# EAGLE board SPv2.2-twin (EAGLE 7.1.0)
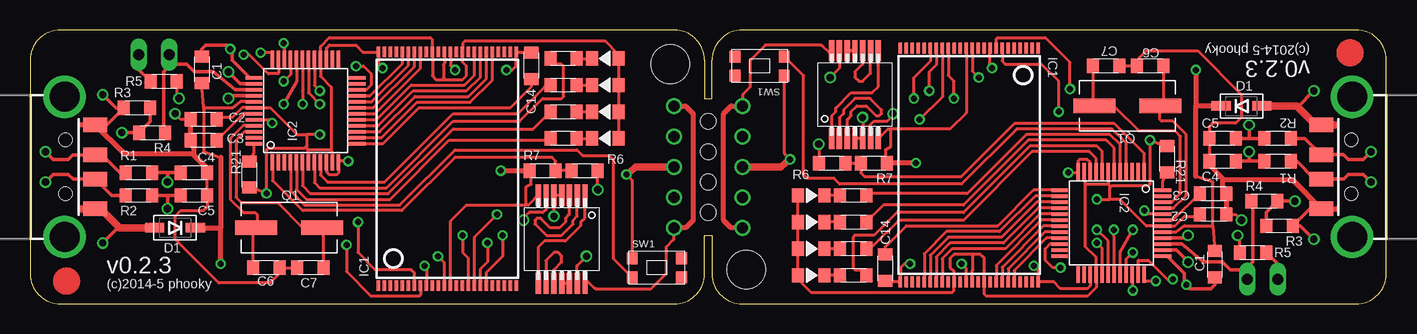
[diagram p0: board, top side]
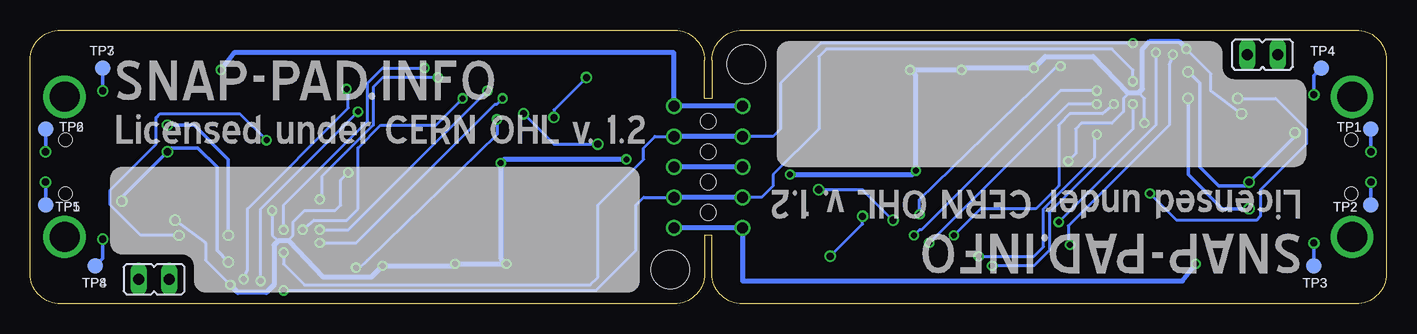
[diagram p1: board, bottom side, seen from below]

Size 113.03 x 22.86 mm. Coordinates in mm from the lower left corner, seen from the top.
Outline: 0,20.36 0,2.5 arc90 2.5,0 53.7,0 arc90 56.2,2.5 56.2,5.71 56.83,5.71 56.83,2.5 arc90 59.33,0 110.53,0 arc90 113.03,2.5 113.03,20.36 arc90 110.53,22.86 59.33,22.86 arc90 56.83,20.32 56.83,17.14 56.2,17.14 56.2,20.32 arc90 53.7,22.86 2.5,22.86 arc90 0,20.36
Copper layers (1*16): Top 0.0356mm / dielectric 1.5011mm / Bottom 0.0356mm
Design rules "LaenPCBOrder": minimum track width 6mil, minimum drill 13mil, track to track 6mil, track to pad 6mil, pad to pad 6mil, via to via 6mil, smd to smd 6mil, copper to edge 15mil, drill to drill 6mil, minimum pad ring 7mil, minimum via ring 7mil, stop-mask expansion 3mil, vias tented up to drill 0mil, thermal gap 10mil
Holes 3.2 mm at 53.34,20 59.69,2.86
Holes 1.3 mm at 56.51,15.24 56.51,12.7 56.51,10.16 56.51,7.62

## Footprints (pad centres in the part's own frame; a part is rotated, then mirrored left to right if it is on the bottom)
R0805 = smd 1 x 1.2: P$1 1.1,0; P$2 -1.1,0
SOD123 = smd 1.6 x 0.8: ANODE 1.7,0; CATHODE -1.7,0
TSOP48 = smd 0.9 x 0.3: 1 -9.75,5.75; 2 -9.75,5.25; 3 -9.75,4.75; 4 -9.75,4.25; 5 -9.75,3.75; 6 -9.75,3.25; 7 -9.75,2.75; 8 -9.75,2.25; 9 -9.75,1.75; 10 -9.75,1.25; 11 -9.75,0.75; 12 -9.75,0.25; 13 -9.75,-0.25; 14 -9.75,-0.75; 15 -9.75,-1.25; 16 -9.75,-1.75; 17 -9.75,-2.25; 18 -9.75,-2.75; 19 -9.75,-3.25; 20 -9.75,-3.75; 21 -9.75,-4.25; 22 -9.75,-4.75; 23 -9.75,-5.25; 24 -9.75,-5.75; 25 9.75,-5.75; 26 9.75,-5.25; 27 9.75,-4.75; 28 9.75,-4.25; 29 9.75,-3.75; 30 9.75,-3.25; 31 9.75,-2.75; 32 9.75,-2.25; 33 9.75,-1.75; 34 9.75,-1.25; 35 9.75,-0.75; 36 9.75,-0.25; 37 9.75,0.25; 38 9.75,0.75; 39 9.75,1.25; 40 9.75,1.75; 41 9.75,2.25; 42 9.75,2.75; 43 9.75,3.25; 44 9.75,3.75; 45 9.75,4.25; 46 9.75,4.75; 47 9.75,5.25; 48 9.75,5.75
PT48 = smd 1.4 x 0.3: 1 -4.3,2.75; 2 -4.3,2.25; 3 -4.3,1.75; 4 -4.3,1.25; 5 -4.3,0.75; 6 -4.3,0.25; 7 -4.3,-0.25; 8 -4.3,-0.75; 9 -4.3,-1.25; 10 -4.3,-1.75; 11 -4.3,-2.25; 12 -4.3,-2.75; 25 4.3,-2.75; 26 4.3,-2.25; 27 4.3,-1.75; 28 4.3,-1.25; 29 4.3,-0.75; 30 4.3,-0.25; 31 4.3,0.25; 32 4.3,0.75; 33 4.3,1.25; 34 4.3,1.75; 35 4.3,2.25; 36 4.3,2.75 | smd 0.3 x 1.4: 13 -2.75,-4.3; 14 -2.25,-4.3; 15 -1.75,-4.3; 16 -1.25,-4.3; 17 -0.75,-4.3; 18 -0.25,-4.3; 19 0.25,-4.3; 20 0.75,-4.3; 21 1.25,-4.3; 22 1.75,-4.3; 23 2.25,-4.3; 24 2.75,-4.3; 37 2.75,4.3; 38 2.25,4.3; 39 1.75,4.3; 40 1.25,4.3; 41 0.75,4.3; 42 0.25,4.3; 43 -0.25,4.3; 44 -0.75,4.3; 45 -1.25,4.3; 46 -1.75,4.3; 47 -2.25,4.3; 48 -2.75,4.3
SSOP14 = smd 0.451 x 1.766: 1 -1.95,-3.675; 2 -1.3,-3.675; 3 -0.65,-3.675; 4 0,-3.675; 5 0.65,-3.675; 6 1.3,-3.675; 7 1.95,-3.675; 8 1.95,3.675; 9 1.3,3.675; 10 0.65,3.675; 11 0,3.675; 12 -0.65,3.675; 13 -1.3,3.675; 14 -1.95,3.675
USB-A-SMT-MALE = smd 1.2 x 2: D+1 1.027,-3.67; D-1 -1.027,-3.67; GND1 3.5,-3.67; VBUS1 -3.5,-3.67 | drill 2.5 pad 2.9: P$1 -5.85,-1.1; P$2 5.85,-1.1 | hole 1.1: 2.25,-1.17; -2.25,-1.17
CSM-3X = smd 3.5 x 1.2: P$1 -2.75,0; P$2 2.75,0
JP1 = drill 0.914 long: 1 0,-1.27; 2 0,1.27
KMR-2-SWITCH = smd 0.9 x 1: PA1 -2.05,-0.8; PA2 2.05,-0.8; PB1 -2.05,0.8; PB2 2.05,0.8
TP13R = smd 1.3 x 1.3: TP 0,0
LED0805 = smd 1 x 1.2: ANODE -1.1,0; CATHODE 1.1,0
SNAP-HALF = drill 0.9: P$1 -3.81,5.08; P$2 -3.81,2.54; P$3 -3.81,0; P$4 -3.81,-2.54; P$5 -3.81,-5.08

## Placement (x,y rotation side)
C1  470nF  [R0805]  14.29,19.53 270 top
C2  220nF  [R0805]  14.45,15.4 0 top
C3  220nF  [R0805]  14.45,13.65 0 top
C4  20pF  [R0805]  13.65,10.95 180 top
C5  20pF  [R0805]  13.65,9.05 180 top
C6  20pF  [R0805]  19.68,3.02 0 top
C7  20pF  [R0805]  23.34,3.02 180 top
C8  470nF  [R0805]  98.74,3.33 90 top
C9  220nF  [R0805]  98.58,7.46 180 top
C10  220nF  [R0805]  98.58,9.21 180 top
C11  20pF  [R0805]  99.38,11.91 0 top
C12  20pF  [R0805]  99.38,13.81 0 top
C13  20pF  [R0805]  93.34,19.84 180 top
C14  470nF  [R0805]  41.75,19.84 270 top
C15  20pF  [R0805]  89.69,19.84 0 top
C16  470nF  [R0805]  71.28,3.02 90 top
D1  [SOD123]  12.07,6.35 180 top
D2  [SOD123]  100.97,16.51 0 top
IC1  S34ML0XG1  [TSOP48]  34.77,11.27 90 top
IC2  F5508  [PT48]  22.93,16.12 90 top
IC3  S34ML0XG1  [TSOP48]  78.26,11.59 270 top
IC4  74LS14DB  [SSOP14]  44.29,5.4 180 top
IC5  F5508  [PT48]  90.1,6.74 270 top
IC6  74LS14DB  [SSOP14]  68.74,17.46 0 top
JP1  USBA-SMD-MALE  [USB-A-SMT-MALE]  1.75,11.43 90 top
JP2  USBA-SMD-MALE  [USB-A-SMT-MALE]  111.28,11.43 270 top
Q1  12MHz  [CSM-3X]  21.59,6.35 0 top
Q2  12MHz  [CSM-3X]  91.44,16.51 180 top
R1  27 5%  [R0805]  9.05,10.95 0 top
R2  27 5%  [R0805]  9.05,9.05 0 top
R3  1M  [R0805]  8.89,16.35 180 top
R4  1.4K 1%  [R0805]  10.16,14.29 180 top
R5  130  [R0805]  11.11,18.57 180 top
R6  1.4k  [R0805]  46.2,11.11 180 top
R7  1.4k  [R0805]  42.7,11.11 180 top
R8  130  [R0805]  44.45,13.81 0 top
R9  130  [R0805]  44.45,16.03 0 top
R10  130  [R0805]  44.45,20.48 0 top
R11  130  [R0805]  44.45,18.26 0 top
R12  27 5%  [R0805]  103.98,11.91 180 top
R13  27 5%  [R0805]  103.98,13.81 180 top
R14  1M  [R0805]  104.14,6.51 0 top
R15  1.4K 1%  [R0805]  102.87,8.57 0 top
R16  130  [R0805]  101.92,4.29 0 top
R17  1M  [R0805]  94.77,12.06 270 top
R18  130  [R0805]  68.58,9.05 180 top
R19  130  [R0805]  68.58,6.83 180 top
R20  130  [R0805]  68.58,2.38 180 top
R21  1M  [R0805]  18.26,10.79 90 top
R22  130  [R0805]  68.58,4.6 180 top
R23  1.4k  [R0805]  66.83,11.75 0 top
R24  1.4k  [R0805]  70.33,11.75 0 top
SJ1  [JP1]  10.32,20.8 270 bottom
SJ2  [JP1]  102.71,2.06 90 bottom
SW1  KMR-2  [KMR-2-SWITCH]  52.23,3.02 180 top
SW2  KMR-2  [KMR-2-SWITCH]  60.8,19.84 0 top
TP1  TPTP13R  [TP13R]  1.27,14.61 0 bottom
TP2  TPTP13R  [TP13R]  1.27,8.26 0 bottom
TP3  TPTP13R  [TP13R]  6.03,3.17 0 bottom
TP4  TPTP13R  [TP13R]  5.4,19.68 0 bottom
TP5  TPTP13R  [TP13R]  111.76,8.26 180 bottom
TP6  TPTP13R  [TP13R]  111.76,14.61 180 bottom
TP7  TPTP13R  [TP13R]  107,19.68 180 bottom
TP8  TPTP13R  [TP13R]  107.63,3.17 180 bottom
U$1  LED  [LED0805]  65.09,9.05 0 top
U$2  SNAP-HALF  [SNAP-HALF]  57.47,11.43 180 bottom
U$3  FIDUCAL  [FIDUCAL]  3.02,1.91 0 top
U$4  LED  [LED0805]  65.09,6.83 0 top
U$5  LED  [LED0805]  47.94,13.81 180 top
U$6  LED  [LED0805]  47.94,16.03 180 top
U$7  LED  [LED0805]  47.94,20.48 180 top
U$8  LED  [LED0805]  47.94,18.26 180 top
U$9  LED  [LED0805]  65.09,2.38 0 top
U$10  LED  [LED0805]  65.09,4.6 0 top
U$11  SNAP-HALF  [SNAP-HALF]  55.56,11.43 0 bottom
U$12  FIDUCAL  [FIDUCAL]  110.01,20.95 180 top

## Library data of the parts
C1-C16 D1 D2 JP1 JP2 Q1 Q2 R1-R24 SW1 SW2 U$1-U$12 = Passives
IC1 IC3 = Flash
IC2 IC5 = TI_MSP430_v16
IC4 IC6 = 74xx-db-us
SJ1 SJ2 = jumper
TP1-TP8 = testpad

## Nets
!CE!_A: IC1.9 IC2.32
!CE!_A1: IC3.9 IC5.32
!RE!_A: IC1.8 IC2.35
!RE!_A1: IC3.8 IC5.35
!RST_A!: IC2.48 R21.P$1
!RST_A!1: IC5.48 R17.P$1
!WE!_A: IC1.18 IC2.30
!WE!_A1: IC3.18 IC5.30
!WP!_A: IC1.19 IC2.29
!WP!_A1: IC3.19 IC5.29
+1V8_A: C3.P$1 IC2.43
+1V8_A1: C10.P$1 IC5.43
+3V3_A: C2.P$1 IC1.12 IC1.34 IC1.37 IC1.39 IC2.7 IC2.11 IC2.28 IC2.42 R5.P$2 R21.P$2 U$5.ANODE U$6.ANODE U$7.ANODE U$8.ANODE
+3V3_A1: C9.P$1 IC3.12 IC3.34 IC3.37 IC3.39 IC5.7 IC5.11 IC5.28 IC5.42 R16.P$2 R17.P$2 U$1.ANODE U$4.ANODE U$9.ANODE U$10.ANODE
ALE_A: IC1.17 IC2.22
ALE_A1: IC3.17 IC5.22
CLE_A: IC1.16 IC2.31
CLE_A1: IC3.16 IC5.31
D+_A: C4.P$1 IC2.38 R1.P$1 R3.P$2 R4.P$1
D+_A1: C11.P$1 IC5.38 R12.P$1 R14.P$2 R15.P$1
D-_A: C5.P$1 IC2.40 R2.P$1
D-_A1: C12.P$1 IC5.40 R13.P$1
DOUT: IC2.1 R6.P$1 R7.P$2
DOUT1: IC5.1 R23.P$1 R24.P$2
GND: C1.P$2 C2.P$2 C3.P$2 C4.P$2 C5.P$2 C6.P$1 C7.P$1 C8.P$2 C9.P$2 C10.P$2 C11.P$2 C12.P$2 C13.P$1 C14.P$2 C15.P$1 C16.P$2 IC1.13 IC1.25 IC1.36 IC1.48 IC2.10 IC2.12 IC2.27 IC2.37 IC2.44 IC3.13 IC3.25 IC3.36 IC3.48 IC4.7 IC5.10 IC5.12 IC5.27 IC5.37 IC5.44 IC6.7 JP1.GND1 JP2.GND1 R3.P$1 R7.P$1 R14.P$1 R24.P$1 SW1.PA1 SW1.PA2 SW2.PA1 SW2.PA2 TP4.TP TP8.TP U$2.P$3 U$11.P$3
N$1: JP1.D+1 R1.P$2 TP1.TP
N$2: JP1.D-1 R2.P$2 TP2.TP
N$3: C14.P$1 IC2.13
N$4: R5.P$1 SJ1.2
N$5: IC4.11 IC4.12
N$6: IC4.9 IC4.10
N$7: IC4.1 IC4.8
N$8: IC4.2 IC4.3
N$9: IC4.4 IC4.5 IC4.13
N$10: IC4.6 R6.P$2
N$11: JP2.D+1 R12.P$2 TP5.TP
N$12: JP2.D-1 R13.P$2 TP6.TP
N$13: C16.P$1 IC5.13
N$14: R20.P$1 U$9.CATHODE
N$15: R19.P$1 U$4.CATHODE
N$16: R18.P$1 U$1.CATHODE
N$17: R22.P$1 U$10.CATHODE
N$18: IC5.9 R22.P$2
N$19: IC2.9 R11.P$2
N$20: IC5.8 R20.P$2
N$21: IC5.6 R19.P$2
N$22: R10.P$1 U$7.CATHODE
N$23: R9.P$1 U$6.CATHODE
N$24: R8.P$1 U$5.CATHODE
N$25: R11.P$1 U$8.CATHODE
N$26: IC2.8 R10.P$2
N$27: IC2.6 R9.P$2
N$28: IC2.5 R8.P$2
N$29: IC5.5 R18.P$2
N$30: R16.P$1 SJ2.2
N$31: D2.ANODE JP2.VBUS1 TP7.TP
N$32: IC6.11 IC6.12
N$33: D1.ANODE JP1.VBUS1 TP3.TP
N$34: IC6.9 IC6.10
N$35: IC6.1 IC6.8
N$36: IC6.2 IC6.3
N$37: IC6.4 IC6.5 IC6.13
N$38: IC6.6 R23.P$2
NANDIO_A0: IC1.29 IC2.14
NANDIO_A1: IC1.30 IC2.15
NANDIO_A2: IC1.31 IC2.16
NANDIO_A3: IC1.32 IC2.17
NANDIO_A4: IC1.41 IC2.18
NANDIO_A5: IC1.42 IC2.19
NANDIO_A6: IC1.43 IC2.20
NANDIO_A7: IC1.44 IC2.21
NANDIO_A8: IC3.29 IC5.14
NANDIO_A9: IC3.30 IC5.15
NANDIO_A10: IC3.31 IC5.16
NANDIO_A11: IC3.32 IC5.17
NANDIO_A12: IC3.41 IC5.18
NANDIO_A13: IC3.42 IC5.19
NANDIO_A14: IC3.43 IC5.20
NANDIO_A15: IC3.44 IC5.21
PUR_A: IC2.39 R4.P$2 SJ1.1
PUR_A1: IC5.39 R15.P$2 SJ2.1
R/B_A: IC1.7 IC2.36
R/B_A1: IC3.7 IC5.36
RX_A: IC2.34 IC5.33 U$2.P$4 U$11.P$2
SW_A: IC2.4 SW1.PB1 SW1.PB2
SW_A1: IC5.4 SW2.PB1 SW2.PB2
TCK_A: IC2.26
TCK_A1: IC5.26
TDI_A: IC2.24
TDI_A1: IC5.24
TDO_A: IC2.23
TDO_A1: IC5.23
TMS_A: IC2.25
TMS_A1: IC5.25
TST_A: IC2.47
TST_A1: IC5.47
TX_A: IC2.33 IC5.34 U$2.P$2 U$11.P$4
VBUS: C1.P$1 C8.P$1 D1.CATHODE D2.CATHODE IC2.41 IC4.14 IC5.41 IC6.14 U$2.P$1 U$2.P$5 U$11.P$1 U$11.P$5
XT2IN_A: C6.P$2 IC2.45 Q1.P$1
XT2IN_A1: C13.P$2 IC5.45 Q2.P$1
XT2OUT_A: C7.P$2 IC2.46 Q1.P$2
XT2OUT_A1: C15.P$2 IC5.46 Q2.P$2

## Tracks (layer width: path | path; a pad name or v marks a point on that pad's centre or on a via)
!CE!_A  (via drill 0.5)
  Top 0.254: IC2.32 22.18,18.53 v21.11,16.67 | v32.86,3.17 33.02,3.02 IC1.9
  Bottom 0.254: v21.11,16.67 21.11,14.61 28.1,7.62 28.1,4.45 29.37,3.17 v32.86,3.17
!CE!_A1  (via drill 0.5)
  Top 0.254: IC5.32 90.85,4.33 v91.92,6.19 | v80.17,19.68 80.01,19.84 IC3.9
  Bottom 0.254: v91.92,6.19 91.92,8.26 84.93,15.24 84.93,18.41 83.66,19.68 v80.17,19.68
!RE!_A  (via drill 0.5)
  Top 0.254: IC2.35 20.68,19.25 20.64,19.21 19.84,19.21 18.26,20.8 v17.78,20.8 | v26.35,4.92 26.35,2.7 28.42,0.64 32.38,0.64 32.52,0.77 IC1.8
  Bottom 0.254: v17.78,20.8 18.1,20 18.1,14.92 26.51,6.51 26.51,5.08 v26.35,4.92
!RE!_A1  (via drill 0.5)
  Top 0.254: IC5.35 92.35,3.6 92.39,3.65 93.19,3.65 94.77,2.06 v95.25,2.06 | v86.68,17.94 86.68,20.16 84.61,22.23 80.65,22.23 80.51,22.09 IC3.8
  Bottom 0.254: v95.25,2.06 94.93,2.86 94.93,7.94 86.52,16.35 86.52,17.78 v86.68,17.94
!RST_A!
  Top 0.254: IC2.48 18.63,12.59 R21.P$1
!RST_A!1
  Top 0.254: IC5.48 94.4,10.27 R17.P$1
!WE!_A  (via drill 0.5)
  Top 0.254: IC2.30 23.18,17.61 v24.13,16.67 | v38.1,5.08 38.1,3.49 37.52,2.91 IC1.18
  Bottom 0.254: v24.13,16.67 26.51,16.67 v38.1,5.08
!WE!_A1  (via drill 0.5)
  Top 0.254: IC5.30 89.85,5.25 v88.9,6.19 | v74.93,17.78 74.93,19.37 75.51,19.95 IC3.18
  Bottom 0.254: v88.9,6.19 86.52,6.19 v74.93,17.78
!WP!_A  (via drill 0.5)
  Top 0.254: IC2.29 23.68,18.23 v24.13,17.78 | v39.37,5.71 39.37,3.97 38.02,2.62 IC1.19
  Bottom 0.254: v24.13,17.78 27.15,17.78 38.73,6.19 38.89,6.19 v39.37,5.71
!WP!_A1  (via drill 0.5)
  Top 0.254: IC5.29 89.35,4.63 v88.9,5.08 | v73.66,17.14 73.66,18.89 75.01,20.25 IC3.19
  Bottom 0.254: v88.9,5.08 85.88,5.08 74.3,16.67 74.14,16.67 v73.66,17.14
+1V8_A
  Top 0.254: IC2.43 17.77,15.87 C3.P$1
+1V8_A1
  Top 0.254: IC5.43 95.26,6.99 C10.P$1
+3V3_A  (via drill 0.5, 0.6)
  Top 0.254: IC2.11 25.18,12.6 25.08,12.86 | 25.08,12.86 23.18,12.86 | IC2.7 23.18,12.55 23.18,12.86 | U$5.ANODE U$6.ANODE U$8.ANODE U$7.ANODE 49.04,20.81 47.94,21.91 36.2,21.91 36.04,21.75 36.04,21.04 IC1.34 36.04,21 36.04,20.16 36.35,19.84 36.35,19.05 36.04,18.73 34.61,18.73 | IC1.37 34.52,20.07 34.45,20 34.45,18.89 34.61,18.73 | 34.61,18.73 33.81,18.73 33.52,19.03 IC1.39 33.5,21.04 33.5,22.07 33.34,22.23 24.92,22.23 24.18,21.48 IC2.28 24.18,19 25.08,18.1 25.08,12.86 | 23.18,12.86 23.02,13.02 23.02,13.18 | 23.02,14.13 22.23,14.13 19.98,16.37 IC2.42 17.64,16.37 16.83,15.56 15.71,15.56 C2.P$1 | 23.02,14.13 23.02,13.18 | IC1.12 34.52,3.42 v33.97,3.97 | v24.13,14.13 23.02,14.13 | R21.P$2 18.59,9.7 v19.68,9.21 19.68,12.86 19.84,13.02 22.86,13.02 23.02,13.18 | R5.P$2 12.21,17.32 v12.38,17.14
  Bottom 0.254: v33.97,3.97 29.37,3.97 28.57,4.76 28.57,7.94 24.29,12.22 24.29,13.97 v24.13,14.13 | v19.68,9.21 17.46,6.99 10.79,6.99 10.48,7.3 10.48,9.53 6.67,13.34 6.67,14.61 9.21,17.14 v12.38,17.14
+3V3_A1  (via drill 0.5, 0.6)
  Top 0.254: IC5.11 87.85,10.26 87.95,10 | 87.95,10 89.85,10 | IC5.7 89.85,10.31 89.85,10 | U$1.ANODE U$4.ANODE U$10.ANODE U$9.ANODE 63.99,2.05 65.09,0.95 76.84,0.95 76.99,1.11 76.99,1.82 IC3.34 76.99,1.86 76.99,2.7 76.68,3.02 76.68,3.81 76.99,4.13 78.42,4.13 | IC3.37 78.51,2.79 78.58,2.86 78.58,3.97 78.42,4.13 | 78.42,4.13 79.22,4.13 79.51,3.83 IC3.39 79.53,1.82 79.53,0.79 79.69,0.64 88.11,0.64 88.85,1.38 IC5.28 88.85,3.86 87.95,4.76 87.95,10 | 89.85,10 90.01,9.84 90.01,9.68 | 90.01,8.73 90.81,8.73 93.05,6.49 IC5.42 95.39,6.49 96.2,7.3 97.33,7.3 C9.P$1 | 90.01,8.73 90.01,9.68 | IC3.12 78.51,19.43 v79.06,18.89 | v88.9,8.73 90.01,8.73 | R17.P$2 94.45,13.16 v93.34,13.65 93.34,10 93.19,9.84 90.17,9.84 90.01,9.68 | R16.P$2 100.82,5.54 v100.65,5.71
  Bottom 0.254: v79.06,18.89 83.66,18.89 84.45,18.1 84.45,14.92 88.74,10.64 88.74,8.89 v88.9,8.73 | v93.34,13.65 95.57,15.88 102.23,15.88 102.55,15.56 102.55,13.34 106.36,9.53 106.36,8.26 103.82,5.71 v100.65,5.71
ALE_A  (via drill 0.5)
  Top 0.254: IC1.17 37.02,5.58 v38.89,7.46 | v27.15,19.84 27.78,19.84 28.42,19.21 28.42,18.26 28.03,17.87 IC2.22
  Bottom 0.254: v38.89,7.46 38.89,8.73 28.1,19.21 27.46,19.84 v27.15,19.84
ALE_A1  (via drill 0.5)
  Top 0.254: IC3.17 76.01,17.28 v74.14,15.4 | v85.88,3.02 85.25,3.02 84.61,3.65 84.61,4.6 85,4.99 IC5.22
  Bottom 0.254: v74.14,15.4 74.14,14.13 84.93,3.65 85.57,3.02 v85.88,3.02
CLE_A  (via drill 0.5)
  Top 0.254: IC2.31 22.68,17.76 v22.7,16.67 | IC1.16 36.52,3.81 36.04,4.29 v36.04,5.71
  Bottom 0.254: v22.7,16.67 23.65,15.88 26.35,15.88 27.3,14.92 27.3,9.84 29.21,7.94 33.81,7.94 v36.04,5.71
CLE_A1  (via drill 0.5)
  Top 0.254: IC5.31 90.35,5.1 v90.33,6.19 | IC3.16 76.51,19.05 76.99,18.57 v76.99,17.14
  Bottom 0.254: v90.33,6.19 89.38,6.99 86.68,6.99 85.73,7.94 85.73,13.02 83.82,14.92 79.22,14.92 v76.99,17.14
D+_A  (via drill 0.6)
  Top 0.305: R1.P$1 11.43,10.95 | 11.43,10.95 C4.P$1 | IC2.38 17.51,18.37 v16.51,19.37 | v11.43,10.16 11.43,10.95 | R3.P$2 9.99,15.22 R4.P$1 v7.62,14.29
  Bottom 0.305: v16.51,19.37 15.56,18.41 15.56,11.43 13.97,9.84 11.75,9.84 v11.43,10.16 7.62,13.97 v7.62,14.29
D+_A1  (via drill 0.6)
  Top 0.305: R12.P$1 101.6,11.91 | 101.6,11.91 C11.P$1 | IC5.38 95.52,4.49 v96.52,3.49 | v101.6,12.7 101.6,11.91 | R14.P$2 103.04,7.64 R15.P$1 v105.41,8.57
  Bottom 0.305: v96.52,3.49 97.47,4.45 97.47,11.43 99.06,13.02 101.28,13.02 v101.6,12.7 105.41,8.89 v105.41,8.57
D-_A  (via drill 0.6)
  Top 0.305: R2.P$1 11.43,9.05 | 11.43,9.05 C5.P$1 | IC2.40 16.73,17.37 v16.51,17.14 | v11.43,7.94 11.43,9.05
  Bottom 0.305: v16.51,17.14 16.51,10.79 13.65,7.94 v11.43,7.94
D-_A1  (via drill 0.6)
  Top 0.305: R13.P$1 101.6,13.81 | 101.6,13.81 C12.P$1 | IC5.40 96.3,5.49 v96.52,5.71 | v101.6,14.92 101.6,13.81
  Bottom 0.305: v96.52,5.71 96.52,12.06 99.38,14.92 v101.6,14.92
DOUT
  Top 0.254: IC2.1 20.18,10.3 22.7,7.78 30.96,7.78 35.4,12.22 43.5,12.22 43.8,11.92 R7.P$2 R6.P$1
DOUT1
  Top 0.254: IC5.1 92.85,12.56 90.33,15.08 82.07,15.08 77.63,10.64 69.53,10.64 69.23,10.94 R24.P$2 R23.P$1
GND  (via drill 0.5, 0.6)
  Top 0.254: IC2.10 24.68,11.04 24.92,10.79 25.56,10.79 25.68,10.92 IC2.12 25.77,11.91 v26.51,11.91 | IC1.36 35.02,19.91 v35.4,19.53 | v39.69,19.53 40.16,19.53 40.48,19.84 40.48,20.99 IC1.25 41.67,21.02 C14.P$2 | IC1.13 35.02,6.92 36.35,8.26 41.33,8.26 | IC2.27 24.68,21.35 24.92,21.59 27.15,21.59 27.71,21.02 IC1.48 29.02,20.04 v29.37,19.68 | IC2.37 18.44,18.87 | C4.P$2 C5.P$2 14.76,9.04 14.76,8.1 14.45,7.78 12.54,7.78 12.07,7.3 12.07,5.4 15.72,1.75 20,1.75 20.79,2.53 C6.P$1 C7.P$1 | 41.33,8.26 41.33,9.79 41.75,10 41.75,10.96 R7.P$1 | IC2.44 19.87,15.37 v20.16,15.08 | C2.P$2 12.54,15.4 v12.07,15.88 | IC4.7 41.52,8.26 41.33,8.26 | v49.69,10.79 50.1,10.38 arc-45 50.18,10.2 SW1.PA2 | IC5.10 88.35,11.82 88.11,12.06 87.47,12.06 87.35,11.94 IC5.12 87.26,10.95 v86.52,10.95 | IC3.36 78.01,2.95 v77.63,3.33 | v73.34,3.33 72.87,3.33 72.55,3.02 72.55,1.87 IC3.25 71.36,1.84 C16.P$2 | IC3.13 78.01,15.94 76.68,14.61 71.7,14.61 | IC5.27 88.35,1.51 88.11,1.27 85.88,1.27 85.31,1.84 IC3.48 84.01,2.82 v83.66,3.17 | IC5.37 94.59,3.99 | C11.P$2 C12.P$2 98.27,13.82 98.27,14.76 98.58,15.08 100.49,15.08 100.97,15.56 100.97,17.46 97.31,21.11 93.03,21.11 92.25,20.33 C13.P$1 C15.P$1 | 71.7,14.61 71.7,13.07 71.28,12.86 71.28,11.89 R24.P$1 | IC5.44 93.16,7.49 v92.87,7.78 | C9.P$2 100.49,7.46 v100.97,6.99 | IC6.7 71.51,14.61 71.7,14.61 | v63.34,12.06 62.93,12.48 arc-45 62.85,12.66 SW2.PA2
  Top 0.305: IC2.37 18.28,18.87 16.83,20.32 16.83,21.11 v16.67,21.27 16.35,21.59 14.61,21.59 14.29,21.27 C1.P$2 | JP1.GND1 6.37,14.93 R3.P$1 7.14,16.35 v6.03,17.46 | IC5.37 94.75,3.99 96.2,2.54 96.2,1.75 v96.36,1.59 96.68,1.27 98.42,1.27 98.74,1.59 C8.P$2 | JP2.GND1 106.66,7.93 R14.P$1 105.89,6.51 v107,5.4
  Top 0.406: 4.13,14.93 JP1.GND1 7.8,12.54 13.49,12.54 13.65,12.38 | C2.P$2 C3.P$2 13.65,13.35 13.65,12.38 | v39.21,11.11 R7.P$1 | C4.P$2 14.75,11.28 13.65,12.38 | 108.9,7.93 JP2.GND1 105.23,10.32 99.54,10.32 99.38,10.48 | C9.P$2 C10.P$2 99.38,9.51 99.38,10.48 | v73.82,11.75 R24.P$1 | C11.P$2 98.28,11.58 99.38,10.48
  Top 0.61: U$2.P$3 50.48,11.43 v49.69,10.79 | U$11.P$3 62.55,11.43 v63.34,12.06
  Bottom 0.254: 35.24,19.68 v35.4,19.53 | 21.59,17.62 21.59,17.46 21.91,17.14 21.91,16.03 22.86,15.08 25.4,15.08 25.88,14.61 25.88,12.54 v26.51,11.91 | v20.16,15.08 20.16,17.14 20.64,17.62 | v12.07,15.88 14.61,17.78 14.61,19.21 v16.67,21.27 | 77.79,3.17 v77.63,3.33 | 91.44,5.24 91.44,5.4 91.12,5.71 91.12,6.83 90.17,7.78 87.63,7.78 87.15,8.26 87.15,10.32 v86.52,10.95 | v92.87,7.78 92.87,5.71 92.39,5.24 | v100.97,6.99 98.42,5.08 98.42,3.65 v96.36,1.59
  Bottom 0.305: v6.03,17.46 6.03,19.05 TP4.TP | v107,5.4 107,3.81 TP8.TP
  Bottom 0.406: v35.4,19.53 v39.69,19.53 39.21,19.05 v39.21,11.11 39.53,10.79 v49.69,10.79 | 35.24,19.68 v29.37,19.68 28.42,20.64 24.45,20.64 21.59,17.62 20.64,17.62 20.32,17.94 20.32,21.27 19.68,21.91 17.3,21.91 v16.67,21.27 | v77.63,3.33 v73.34,3.33 73.82,3.81 v73.82,11.75 73.5,12.06 v63.34,12.06 | 77.79,3.17 v83.66,3.17 84.61,2.22 88.58,2.22 91.44,5.24 92.39,5.24 92.71,4.92 92.71,1.59 93.34,0.95 95.73,0.95 v96.36,1.59 | U$2.P$3 U$11.P$3
N$1  (via drill 0.6)
  Top 0.254: JP1.D+1 4.57,12.43
  Top 0.305: 4.57,12.43 3.54,12.43 3.18,12.06 1.9,12.06 v1.27,12.7 | R1.P$2 7.46,10.95 6.03,12.38 5.49,12.38 JP1.D+1
  Bottom 0.305: v1.27,12.7 TP1.TP
N$2  (via drill 0.6)
  Top 0.254: JP1.D-1 4.66,10.43
  Top 0.305: v1.27,10.16 1.9,10.79 3.18,10.79 3.57,10.4 JP1.D-1 6.77,9.05 R2.P$2
  Bottom 0.305: v1.27,10.16 TP2.TP
N$3
  Top 0.254: C14.P$1 41.75,18.1 40,16.35 32.38,16.35 29.4,13.37 IC2.13
N$4
  Top 0.305: SJ1.2 9.05,19.54 R5.P$1
N$5
  Top 0.305: IC4.11 IC4.12
N$6
  Top 0.254: IC4.10 43.66,1.74 43.66,2.86 44.29,3.49 44.29,3.97 43.97,4.29 43.66,4.29 42.99,3.62 IC4.9
N$7
  Top 0.254: IC4.1 46.2,9.03 46.2,7.14 45.88,6.83 45.88,6.51 44.61,5.24 42.86,5.24 42.34,4.72 IC4.8
N$8
  Top 0.254: IC4.3 44.93,9.06 44.93,7.46 44.61,7.14 44.61,6.83 44.13,6.35 43.34,6.35 42.54,7.14 42.23,7.14 42.07,6.99 42.07,6.67 43.02,5.71 44.29,5.71 45.24,6.67 45.24,6.99 45.59,7.33 IC4.2
N$9  (via drill 0.6)
  Top 0.254: IC4.13 45.56,1.75 45.56,3.17 v46.35,3.97 | v43.66,7.3 43.64,7.32 IC4.5 IC4.4
  Bottom 0.254: v46.35,3.97 43.66,6.67 v43.66,7.3
N$10  (via drill 0.6)
  Top 0.254: IC4.6 43.02,9.04 43.02,7.94 42.7,7.62 41.59,7.62 41.12,7.14 v41.12,6.99 | v47.31,9.53 47.3,9.54 R6.P$2
  Bottom 0.254: v41.12,6.99 43.66,9.53 v47.31,9.53
N$11  (via drill 0.6)
  Top 0.254: JP2.D+1 108.46,10.43
  Top 0.305: 108.46,10.43 109.49,10.43 109.86,10.79 111.12,10.79 v111.76,10.16 | R12.P$2 105.57,11.91 107,10.48 107.54,10.48 JP2.D+1
  Bottom 0.305: v111.76,10.16 TP5.TP
N$12  (via drill 0.6)
  Top 0.254: JP2.D-1 108.37,12.43
  Top 0.305: v111.76,12.7 111.12,12.06 109.86,12.06 109.46,12.46 JP2.D-1 106.26,13.81 R13.P$2
  Bottom 0.305: v111.76,12.7 TP6.TP
N$13
  Top 0.254: C16.P$1 71.28,4.76 73.03,6.51 80.65,6.51 83.63,9.49 IC5.13
N$14
  Top 0.254: R20.P$1 U$9.CATHODE
N$15
  Top 0.254: R19.P$1 U$4.CATHODE
N$16
  Top 0.254: R18.P$1 U$1.CATHODE
N$17
  Top 0.254: R22.P$1 U$10.CATHODE
N$18
  Top 0.254: IC5.9 88.85,12.12 88.27,12.7 83.5,12.7 77.79,6.99 72.39,6.99 70.17,4.76 69.84,4.76 R22.P$2
N$19
  Top 0.254: IC2.9 24.18,10.74 24.77,10.16 29.53,10.16 35.24,15.88 40.64,15.88 42.86,18.1 43.19,18.1 R11.P$2
N$20
  Top 0.254: IC5.8 89.35,12.73 88.9,13.18 83.34,13.18 77.79,7.62 72.23,7.62 70.33,5.71 68.74,5.71 68.58,5.56 68.58,3.02 68.74,2.86 69.2,2.86 R20.P$2
N$21
  Top 0.254: IC5.6 90.35,13 89.69,13.65 83.19,13.65 77.79,8.26 71.11,8.26 R19.P$2
N$22
  Top 0.254: R10.P$1 U$7.CATHODE
N$23
  Top 0.254: R9.P$1 U$6.CATHODE
N$24
  Top 0.254: R8.P$1 U$5.CATHODE
N$25
  Top 0.254: R11.P$1 U$8.CATHODE
N$26
  Top 0.254: IC2.8 23.68,10.13 24.13,9.68 29.69,9.68 35.24,15.24 40.8,15.24 42.7,17.14 44.29,17.14 44.45,17.3 44.45,19.84 44.29,20 43.83,20 R10.P$2
N$27
  Top 0.254: IC2.6 22.68,9.86 23.34,9.21 29.84,9.21 35.24,14.61 41.92,14.61 R9.P$2
N$28
  Top 0.254: IC2.5 22.18,9.57 23.02,8.73 30,8.73 34.92,13.65 43.03,13.65 R8.P$2
N$29
  Top 0.254: IC5.5 90.85,13.29 90.01,14.13 83.03,14.13 78.11,9.21 70,9.21 R18.P$2
N$30
  Top 0.305: SJ2.2 103.98,3.32 R16.P$1
N$31  (via drill 0.6)
  Top 0.305: v107,17.78 105.65,16.43
  Top 0.61: 108.74,14.93 JP2.VBUS1 107.15,14.93 105.65,16.43 105.57,16.51 D2.ANODE
  Bottom 0.305: TP7.TP v107,17.78
N$32
  Top 0.305: IC6.11 IC6.12
N$33  (via drill 0.6)
  Top 0.305: v6.03,5.08 7.38,6.43
  Top 0.61: 4.29,7.93 JP1.VBUS1 5.88,7.93 7.38,6.43 7.46,6.35 D1.ANODE
  Bottom 0.305: TP3.TP v6.03,5.08
N$34
  Top 0.254: IC6.10 69.37,21.12 69.37,20 68.74,19.37 68.74,18.89 69.06,18.57 69.37,18.57 70.04,19.24 IC6.9
N$35
  Top 0.254: IC6.1 66.83,13.83 66.83,15.72 67.15,16.03 67.15,16.35 68.42,17.62 70.17,17.62 70.69,18.14 IC6.8
N$36
  Top 0.254: IC6.3 68.1,13.8 68.1,15.4 68.42,15.72 68.42,16.03 68.9,16.51 69.69,16.51 70.48,15.72 70.8,15.72 70.96,15.88 70.96,16.19 70.01,17.14 68.74,17.14 67.79,16.19 67.79,15.88 67.44,15.53 IC6.2
N$37  (via drill 0.6)
  Top 0.254: IC6.13 67.47,21.11 67.47,19.68 v66.67,18.89 | v69.37,15.56 69.39,15.54 IC6.5 IC6.4
  Bottom 0.254: v66.67,18.89 69.37,16.19 v69.37,15.56
N$38  (via drill 0.6)
  Top 0.254: IC6.6 70.01,13.82 70.01,14.92 70.33,15.24 71.44,15.24 71.91,15.72 v71.91,15.88 | v65.72,13.34 65.73,13.32 R23.P$2
  Bottom 0.254: v71.91,15.88 69.37,13.34 v65.72,13.34
NANDIO_A0
  Top 0.254: IC2.14 29.27,13.87 32.23,16.83 36.67,16.83 38.52,18.67 IC1.29
NANDIO_A1
  Top 0.254: IC2.15 29.13,14.37 32.07,17.3 36.51,17.3 38.02,18.81 IC1.30
NANDIO_A2
  Top 0.254: IC2.16 29,14.87 31.91,17.78 36.35,17.78 37.52,18.94 IC1.31
NANDIO_A3
  Top 0.254: IC2.17 28.86,15.37 31.75,18.26 36.2,18.26 37.02,19.08 IC1.32
NANDIO_A4
  Top 0.254: IC2.18 28.73,15.87 32.52,19.66 IC1.41
NANDIO_A5
  Top 0.254: IC2.19 28.59,16.37 32.02,19.79 IC1.42
NANDIO_A6
  Top 0.254: IC2.20 28.46,16.87 31.52,19.93 IC1.43
NANDIO_A7
  Top 0.254: IC2.21 28.32,17.37 31.02,20.06 IC1.44
NANDIO_A8
  Top 0.254: IC5.14 83.76,8.99 80.8,6.03 76.36,6.03 74.51,4.19 IC3.29
NANDIO_A9
  Top 0.254: IC5.15 83.9,8.49 80.96,5.56 76.52,5.56 75.01,4.05 IC3.30
NANDIO_A10
  Top 0.254: IC5.16 84.03,7.99 81.12,5.08 76.68,5.08 75.51,3.92 IC3.31
NANDIO_A11
  Top 0.254: IC5.17 84.17,7.49 81.28,4.6 76.84,4.6 76.01,3.78 IC3.32
NANDIO_A12
  Top 0.254: IC5.18 84.3,6.99 80.51,3.2 IC3.41
NANDIO_A13
  Top 0.254: IC5.19 84.44,6.49 81.01,3.07 IC3.42
NANDIO_A14
  Top 0.254: IC5.20 84.57,5.99 81.51,2.93 IC3.43
NANDIO_A15
  Top 0.254: IC5.21 84.71,5.49 82.01,2.8 IC3.44
PUR_A
  Top 0.305: SJ1.1 11.59,20 | 11.59,20 11.59,19.84 11.11,19.37 11.11,14.44 R4.P$2 | IC2.39 17.06,17.87 15.24,19.37 13.65,19.37 13.02,20 11.59,20
PUR_A1
  Top 0.305: SJ2.1 101.44,2.86 | 101.44,2.86 101.44,3.02 101.92,3.49 101.92,8.43 R15.P$2 | IC5.39 95.97,4.99 97.79,3.49 99.38,3.49 100.01,2.86 101.44,2.86
R/B_A  (via drill 0.5)
  Top 0.254: IC2.36 20.18,20.61 20.16,20.95 v19.21,20.95 | v27.3,6.83 27.3,4.29 28.73,2.86 31.75,2.86 32.02,2.59 IC1.7
  Bottom 0.254: v19.21,20.95 19.21,14.92 v27.3,6.83
R/B_A1  (via drill 0.5)
  Top 0.254: IC5.36 92.85,2.25 92.87,1.91 v93.82,1.91 | v85.73,16.03 85.73,18.57 84.3,20 81.28,20 81.01,20.27 IC3.7
  Bottom 0.254: v93.82,1.91 93.82,7.94 v85.73,16.03
RX_A  (via drill 0.5)
  Top 0.254: IC2.34 21.18,21.36 v21.11,21.75 | IC5.33 91.35,3.75 v91.92,4.29
  Bottom 0.254: v21.11,21.75 47.15,21.75 50.48,18.41 50.48,14.61 51.12,13.97 U$2.P$4 | v91.92,4.29 91.92,3.33 90.17,1.59 66.36,1.59 65.72,2.22 65.72,8.26 61.91,12.06 61.91,13.02 60.96,13.97 U$11.P$2
  Bottom 0.406: U$2.P$4 U$11.P$2
SW_A
  Top 0.254: IC2.4 21.68,9.43 22.86,8.26 30.8,8.26 35.4,12.86 45.56,12.86 46.04,12.38 48.26,12.38 48.58,12.06 48.58,3.79 arc-45 48.62,3.77 SW1.PB2
SW_A1
  Top 0.254: IC5.4 91.35,13.43 90.17,14.61 82.23,14.61 77.63,10 67.47,10 66.99,10.48 64.77,10.48 64.45,10.79 64.45,19.07 arc-45 64.41,19.09 SW2.PB2
TX_A  (via drill 0.5)
  Top 0.254: IC2.33 21.68,19.11 v21.11,18.57 | IC5.34 91.85,1.5 v91.92,1.11
  Bottom 0.254: v21.11,18.57 21.11,19.53 22.86,21.27 46.67,21.27 47.31,20.64 47.31,14.61 51.12,10.79 51.12,9.84 52.07,8.89 U$2.P$2 | v91.92,1.11 65.88,1.11 62.55,4.45 62.55,8.26 61.91,8.89 U$11.P$4
  Bottom 0.406: U$2.P$2 U$11.P$4
VBUS  (via drill 0.5)
  Top 0.254: IC2.41 17.5,16.87 16.83,16.35 14.45,16.35 | 14.45,16.35 14.45,12.7 15.88,12.22 | 14.45,16.35 14.45,16.36 C1.P$1 | IC4.14 46.42,1.91 46.98,1.34 arc45 47.16,1.27 51.75,1.27 52.95,2.47 arc45 53.02,2.65 53.02,4.76 53.58,5.32 arc45 53.66,5.5 U$2.P$1 | IC5.41 95.53,5.99 96.2,6.51 98.58,6.51 | 98.58,6.51 98.58,10.16 97.16,10.64 | 98.58,6.51 98.58,6.5 C8.P$1 | IC6.14 66.61,20.95 66.05,21.52 arc45 65.87,21.59 61.28,21.59 60.08,20.39 arc45 60.01,20.21 60.01,18.1 59.45,17.54 arc45 59.37,17.36 U$11.P$1
  Top 0.406: D1.CATHODE 15.88,6.35 | 15.88,12.22 15.88,6.35 | U$2.P$5 54.61,16.51 55.24,15.88 55.24,6.99 54.61,6.35 U$2.P$1 | v15.88,3.33 15.88,6.35 | D2.CATHODE 97.16,16.51 | 97.16,10.64 97.16,16.51 | U$11.P$5 58.42,6.35 57.78,6.99 57.78,15.88 58.42,16.51 U$11.P$1 | v97.16,19.53 97.16,16.51
  Bottom 0.406: v15.88,3.33 16.99,1.91 53.66,1.91 U$2.P$1 U$11.P$5 | v97.16,19.53 96.04,20.95 59.37,20.95 U$11.P$1 U$2.P$5
XT2IN_A
  Top 0.254: IC2.45 17.73,14.87 16.67,13.81 16.67,8.73 17.78,7.62 18.73,7.62 18.89,7.46 18.89,6.4 Q1.P$1 18.59,6.09 C6.P$2
XT2IN_A1
  Top 0.254: IC5.45 95.3,7.99 96.36,9.05 96.36,14.13 95.25,15.24 94.3,15.24 94.14,15.4 94.14,16.46 Q2.P$1 94.45,16.77 C13.P$2
XT2OUT_A
  Top 0.254: IC2.46 17.86,14.37 17.14,13.65 17.14,8.89 17.62,8.41 20.64,8.41 22.7,6.35 Q1.P$2 24.44,6.25 C7.P$2
XT2OUT_A1
  Top 0.254: IC5.46 95.17,8.49 95.89,9.21 95.89,13.97 95.41,14.45 92.39,14.45 90.33,16.51 Q2.P$2 88.59,16.61 C15.P$2

## Text on the board
tNames: C7 | (c)2014-5 phooky | IC1 | C6 | C1 | v0.2.3 | R5 | R3 | C14 | SW1 | D1 | C2 | C5 | R2 | IC2 | Q1 | R4 | C4 | C3 | R7 | R1 | R6 | R21 | R21 | R1 | R6 | R7 | C4 | Q1 | IC2 | C3 | R4 | C5 | C2 | R2 | D1 | SW1 | C14 | R3 | R5 | v0.2.3 | C1 | C7 | IC1 | (c)2014-5 phooky | C6
_bNames: TP3 | TP4 | TP2 | TP1 | TP1 | TP2 | TP4 | TP3